# EAGLE board Z80_Sound_2 (EAGLE 5.10)
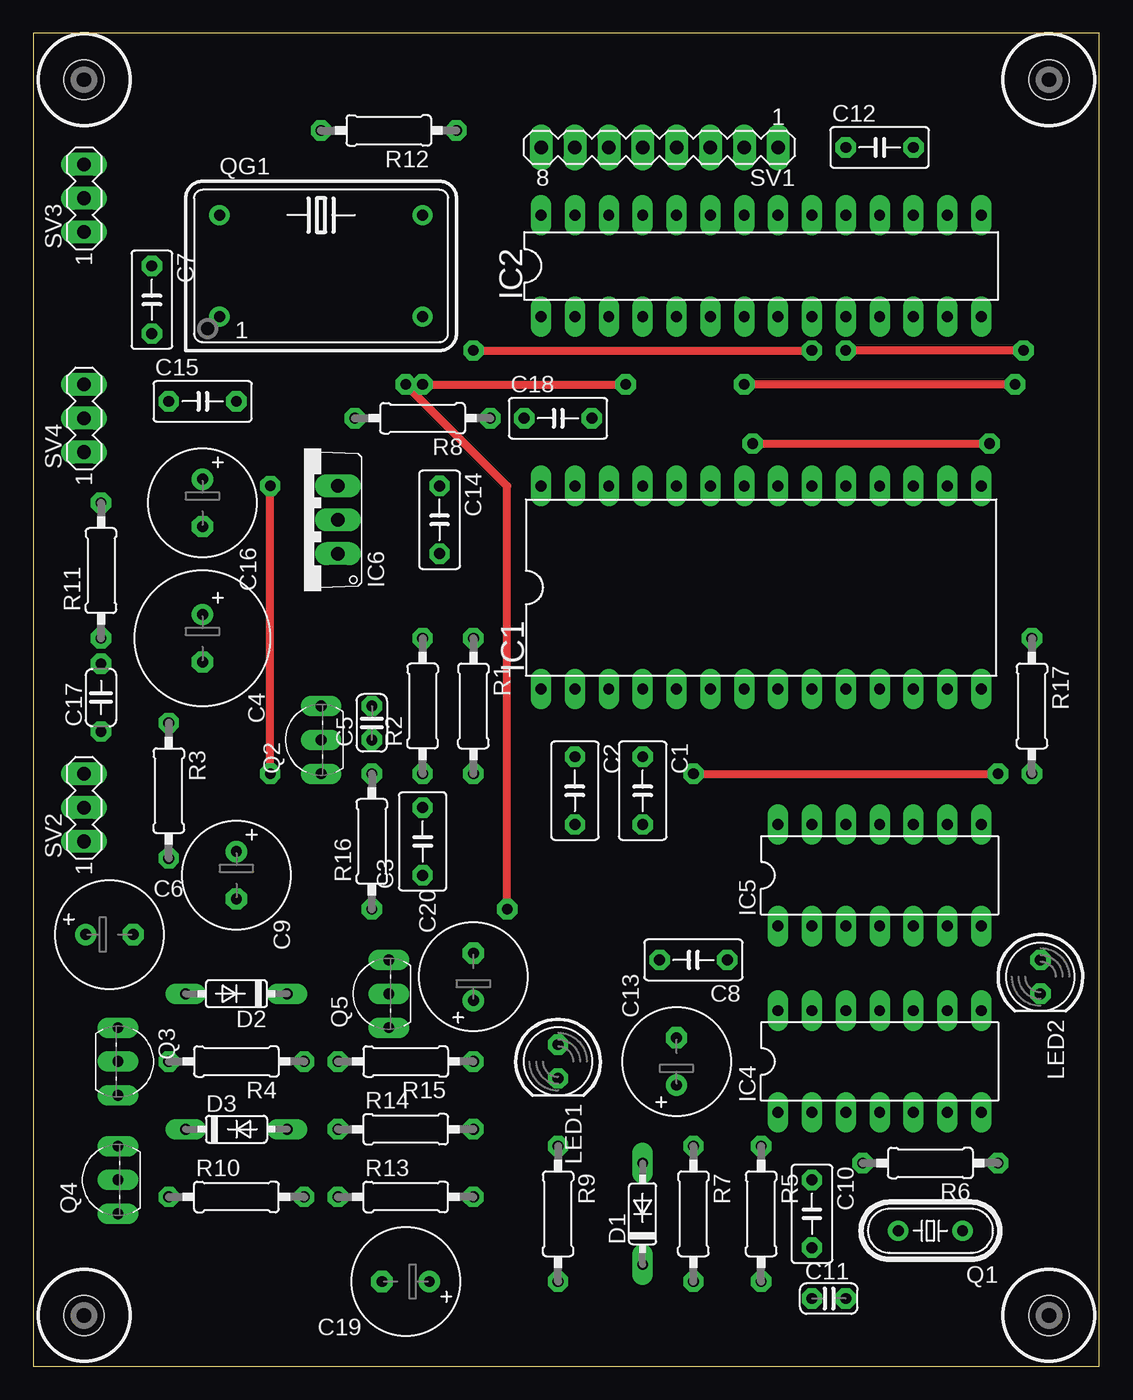
[diagram p0: board, top side]
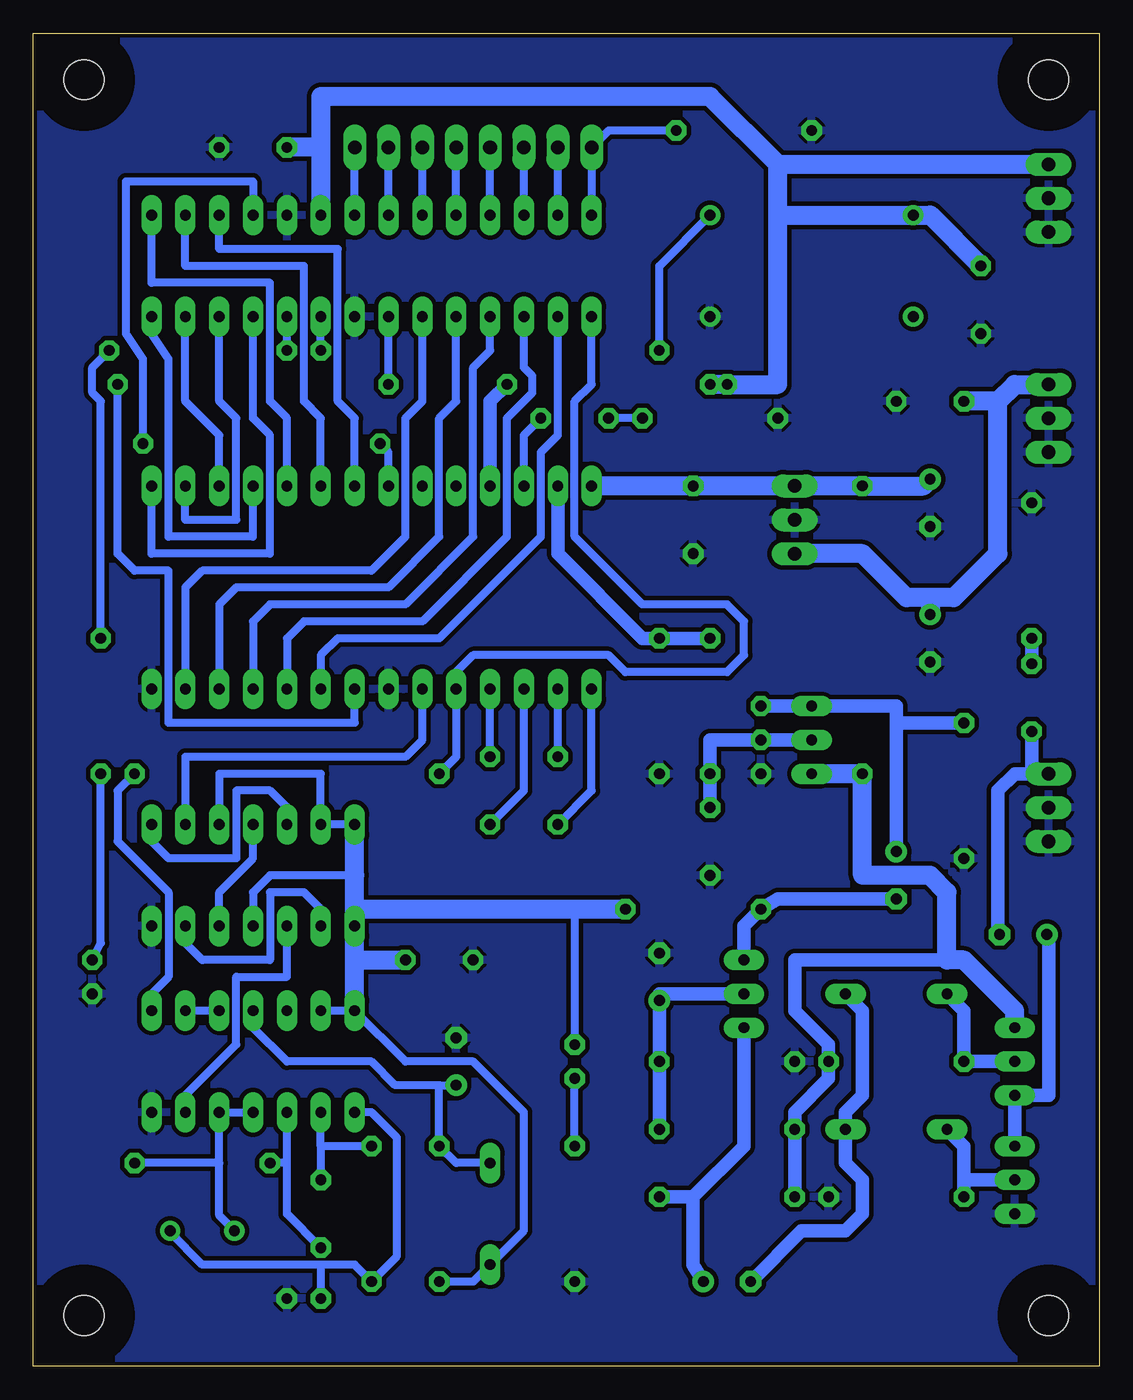
[diagram p1: board, bottom side, seen from below]

Size 79.99 x 100 mm. Coordinates in mm from the lower left corner, seen from the top.
Outline: 0,0 79.99,0 79.99,100 0,100 0,0
Copper layers (1*16): Top 0.035mm / dielectric 1.5mm / Bottom 0.035mm
Design rules "default *": minimum track width 10mil, minimum drill 24mil, track to track 13mil, track to pad 13mil, pad to pad 8mil, via to via 8mil, smd to smd 8mil, copper to edge 12mil, drill to drill 8mil, minimum pad ring 14mil, minimum via ring 14mil, stop-mask expansion 4mil, vias tented up to drill 0mil, thermal gap 10mil

## Footprints (pad centres in the part's own frame; a part is rotated, then mirrored left to right if it is on the bottom)
C050-035X075 = drill 0.813 octagon: 1 -2.54,0; 2 2.54,0
E3,5-10 = drill 0.813 pad 1.6 round: + -1.778,0 | drill 0.813 pad 1.6 octagon: - 1.778,0
C025-024X044 = drill 0.813 octagon: 1 -1.27,0; 2 1.27,0
E3,5-8 = drill 0.813 pad 1.6 round: + -1.778,0 | drill 0.813 pad 1.6 octagon: - 1.778,0
C050-030X075 = drill 0.813 octagon: 1 -2.54,0; 2 2.54,0
C050-024X044 = drill 0.813 octagon: 1 -2.54,0; 2 2.54,0
DO35-7 = drill 0.813 long: A 3.81,0; C -3.81,0
DIL28-6 = drill 0.813 long: 1 -16.51,-7.62; 2 -13.97,-7.62; 3 -11.43,-7.62; 4 -8.89,-7.62; 5 -6.35,-7.62; 6 -3.81,-7.62; 7 -1.27,-7.62; 8 1.27,-7.62; 9 3.81,-7.62; 10 6.35,-7.62; 11 8.89,-7.62; 12 11.43,-7.62; 13 13.97,-7.62; 14 16.51,-7.62; 15 16.51,7.62; 16 13.97,7.62; 17 11.43,7.62; 18 8.89,7.62; 19 6.35,7.62; 20 3.81,7.62; 21 1.27,7.62; 22 -1.27,7.62; 23 -3.81,7.62; 24 -6.35,7.62; 25 -8.89,7.62; 26 -11.43,7.62; 27 -13.97,7.62; 28 -16.51,7.62
DIL28-3 = drill 0.813 long: 1 -16.51,-3.81; 2 -13.97,-3.81; 3 -11.43,-3.81; 4 -8.89,-3.81; 5 -6.35,-3.81; 6 -3.81,-3.81; 7 -1.27,-3.81; 8 1.27,-3.81; 9 3.81,-3.81; 10 6.35,-3.81; 11 8.89,-3.81; 12 11.43,-3.81; 13 13.97,-3.81; 14 16.51,-3.81; 15 16.51,3.81; 16 13.97,3.81; 17 11.43,3.81; 18 8.89,3.81; 19 6.35,3.81; 20 3.81,3.81; 21 1.27,3.81; 22 -1.27,3.81; 23 -3.81,3.81; 24 -6.35,3.81; 25 -8.89,3.81; 26 -11.43,3.81; 27 -13.97,3.81; 28 -16.51,3.81
DIL14 = drill 0.813 long: 1 -7.62,-3.81; 2 -5.08,-3.81; 3 -2.54,-3.81; 4 0,-3.81; 5 2.54,-3.81; 6 5.08,-3.81; 7 7.62,-3.81; 8 7.62,3.81; 9 5.08,3.81; 10 2.54,3.81; 11 0,3.81; 12 -2.54,3.81; 13 -5.08,3.81; 14 -7.62,3.81
TO220V = drill 1.016 long: 1 -2.54,-2.54; 2 0,-2.54; 3 2.54,-2.54
LED5MM = drill 0.813 octagon: A -1.27,0; K 1.27,0
HC49/S = drill 0.813 round: 1 -2.413,0; 2 2.413,0
TO92-EBC = drill 0.813 long: B 0,-1.27; C -2.54,-1.27; E 2.54,-1.27
DIL14S = drill 0.813 round: 1 -7.62,-3.81; 7 7.62,-3.81; 8 7.62,3.81; 14 -7.62,3.81
0207/10 = drill 0.813 octagon: 1 -5.08,0; 2 5.08,0
MA08-1 = drill 1.016 long: 1 -8.89,0; 2 -6.35,0; 3 -3.81,0; 4 -1.27,0; 5 1.27,0; 6 3.81,0; 7 6.35,0; 8 8.89,0
MA03-1 = drill 1.016 long: 1 -2.54,0; 2 0,0; 3 2.54,0
DRIL-3 = hole 3: 0,0

## Placement (x,y rotation side)
C1  22n  [C050-035X075]  45.72,43.18 270 top
C2  22n  [C050-035X075]  40.64,43.18 270 top
C3  1n  [C050-035X075]  29.21,39.37 90 top
C4  470µ  [E3,5-10]  12.7,54.61 270 top
C5  470p  [C025-024X044]  25.4,48.26 90 top
C6  220µ  [E3,5-8]  5.71,32.38 0 top
C7  100n  [C050-030X075]  8.89,80.01 270 top
C8  100n  [C050-030X075]  49.53,30.48 180 top
C9  10µ  [E3,5-8]  15.24,36.83 270 top
C10  100n  [C050-030X075]  58.42,11.43 270 top
C11  27p  [C025-024X044]  59.69,5.08 0 top
C12  100n  [C050-030X075]  63.5,91.44 0 top
C13  4µ7  [E3,5-8]  48.26,22.86 90 top
C14  100n  [C050-030X075]  30.48,63.5 270 top
C15  100n  [C050-030X075]  12.7,72.39 0 top
C16  220µ  [E3,5-8]  12.7,64.77 270 top
C17  47n  [C050-024X044]  5.08,50.16 90 top
C18  100n  [C050-030X075]  39.37,71.12 0 top
C19  22µ  [E3,5-8]  27.94,6.35 180 top
C20  47µ  [E3,5-8]  33.02,29.21 90 top
D1  1N4148  [DO35-7]  45.72,11.43 90 top
D2  1N4148  [DO35-7]  15.24,27.94 180 top
D3  1N4148  [DO35-7]  15.24,17.78 0 top
IC1  8580 SID  [DIL28-6]  54.61,58.42 0 top
IC2  PIC18F2525  [DIL28-3]  54.61,82.55 0 top
IC4  74LS04  [DIL14]  63.5,22.86 0 top
IC5  74LS74N  [DIL14]  63.5,36.83 0 top
IC6  7809  [TO220V]  20.32,63.5 90 top
LED1  [LED5MM]  39.37,22.86 270 top
LED2  [LED5MM]  75.56,29.21 270 top
Q1  4 MHz  [HC49/S]  67.31,10.16 180 top
Q2  BC548  [TO92-EBC]  20.32,46.99 90 top
Q3  BC548  [TO92-EBC]  7.62,22.86 270 top
Q4  BC558C  [TO92-EBC]  5.08,13.97 90 top
Q5  BC548  [TO92-EBC]  25.4,27.94 90 top
QG1  40 MHz  [DIL14S]  21.59,82.55 0 top
R1  1K  [0207/10]  33.02,49.53 270 top
R2  10K  [0207/10]  29.21,49.53 90 top
R3  1K  [0207/10]  10.16,43.18 270 top
R4  4K7  [0207/10]  15.24,22.86 180 top
R5  680R  [0207/10]  54.61,11.43 270 top
R6  680R  [0207/10]  67.31,15.24 180 top
R7  10K  [0207/10]  49.53,11.43 270 top
R8  47K  [0207/10]  29.21,71.12 180 top
R9  470R  [0207/10]  39.37,11.43 270 top
R10  4K7  [0207/10]  15.24,12.7 0 top
R11  10R  [0207/10]  5.08,59.69 90 top
R12  4K7  [0207/10]  26.67,92.71 180 top
R13  4K7  [0207/10]  27.94,12.7 0 top
R14  120K  [0207/10]  27.94,17.78 0 top
R15  22K  [0207/10]  27.94,22.86 180 top
R16  22K  [0207/10]  25.4,39.37 90 top
R17  470R  [0207/10]  74.93,49.53 270 top
SV1  comm  [MA08-1]  46.99,91.44 180 top
SV2  audio out  [MA03-1]  3.81,41.91 90 top
SV3  5V  [MA03-1]  3.81,87.63 90 top
SV4  12V  [MA03-1]  3.81,71.12 90 top
U$1  [DRIL-3]  76.2,96.52 0 top
U$2  [DRIL-3]  76.2,3.81 0 top
U$3  [DRIL-3]  3.81,3.81 0 top
U$4  [DRIL-3]  3.81,96.52 0 top

## Library data of the parts
C1-C20 R1-R17 = rcl
D1-D3 = diode
IC1 = ic-package
IC2 = microchip
IC4 IC5 = 74xx-us
IC6 = linear
LED1 LED2 = led
Q1 QG1 = crystal
Q2 Q3 Q5 = transistor-npn
Q4 = transistor-pnp
SV1-SV4 = con-lstb
U$1-U$4 = special

## Nets
+12V: C4.+ C15.1 IC6.1 SV4.3
/CS: IC1.8 IC2.7
/RES: IC1.5 IC2.1 IC4.8
A0: IC1.9 IC2.2
A1: IC1.10 IC2.3
A2: IC1.11 IC2.4
A3: IC1.12 IC2.5
A4: IC1.13 IC2.6
AUDIO_OUT: IC1.27 R1.1 R2.2
CAP1A: C2.2 IC1.1
CAP1B: C2.1 IC1.2
CAP2A: C1.2 IC1.3
CAP2B: C1.1 IC1.4
CLK_1MHZ: IC1.6 IC5.9
D0: IC1.15 IC2.11
D1: IC1.16 IC2.12
D2: IC1.17 IC2.13
D3: IC1.18 IC2.14
D4: IC1.19 IC2.15
D5: IC1.20 IC2.16
D6: IC1.21 IC2.17
D7: IC1.22 IC2.18
GND: C3.1 C4.- C7.2 C8.2 C11.2 C12.2 C13.- C14.2 C15.2 C16.- C20.- IC1.7 IC1.14 IC2.8 IC2.19 IC4.7 IC5.7 IC6.2 LED2.K Q4.C QG1.7 R1.2 R3.2 R8.2 R9.2 R10.2 R11.2 R12.2 R15.2 R16.2 SV2.1 SV2.2 SV3.1 SV3.2 SV4.1 SV4.2
N$1: IC2.9 QG1.8
N$2: IC4.4 IC4.5 Q1.2 R6.1
N$3: C5.2 C9.+ Q2.E R3.1
N$4: LED1.K R9.1
N$5: C6.- C17.1 SV2.3
N$6: C3.2 C5.1 Q2.B R2.1
N$7: LED2.A R17.2
N$8: C17.2 R11.1
N$9: D3.C Q4.B R10.1
N$10: D2.A Q3.B R4.2
N$11: C11.1 IC4.1 Q1.1 R5.2
N$12: IC5.2 IC5.6
N$13: IC5.8 IC5.12
N$14: IC4.6 IC5.3
N$15: IC5.5 IC5.11
N$16: IC4.9 IC4.10
N$17: C13.+ D1.A IC4.11 R7.1
N$18: C10.1 IC4.2 R5.1
N$19: C10.2 IC4.3 R6.2
N$20: C18.2 IC1.26
N$21: C6.+ Q3.E Q4.E
N$22: C19.- D2.C D3.A
N$23: C18.1 R8.1
N$24: IC2.10 R17.1
N$25: C19.+ Q5.C R13.2
N$26: C9.- Q5.E R16.1
N$27: C20.+ Q5.B R14.2 R15.1
POTX: IC1.24
POTY: IC1.23
RB0: IC2.21 SV1.1
RB1: IC2.22 SV1.2
RB2: IC2.23 SV1.3
RB3: IC2.24 SV1.4
RB4: IC2.25 SV1.5
RB5: IC2.26 SV1.6
RB6: IC2.27 SV1.7
RB7: IC2.28 R12.1 SV1.8
VCC: C7.1 C8.1 C12.1 D1.C IC1.25 IC2.20 IC4.13 IC4.14 IC5.1 IC5.4 IC5.10 IC5.13 IC5.14 LED1.A QG1.14 R7.2 SV3.3
VDD: C14.1 C16.+ IC1.28 IC6.3 Q2.C Q3.C R4.1 R13.1 R14.1

## Tracks (layer width: path | path; a pad name or v marks a point on that pad's centre or on a via)
+12V
  Bottom 1.422: 7.62,72.39 7.62,60.96 10.92,57.66 12.7,57.66 | 7.62,72.39 6.35,73.66 SV4.3 | IC6.1 17.78,60.96 14.48,57.66 12.7,57.66 | 7.62,72.39 C15.1 | 12.7,57.66 C4.+
/CS  (via drill 0.8)
  Top 0.61: v73.66,73.66 v53.34,73.66
  Bottom 0.61: v53.34,73.66 IC2.7 | IC1.8 55.88,48.26 69.85,48.26 69.85,59.69 72.39,59.69 73.66,60.96 v73.66,73.66
/RES  (via drill 0.8)
  Top 0.61: v49.53,44.45 v72.39,44.45
  Bottom 0.61: IC2.1 38.1,73.66 39.37,72.39 39.37,62.23 34.29,57.15 27.94,57.15 26.67,55.88 26.67,53.34 27.94,52.07 35.56,52.07 36.83,53.34 46.99,53.34 48.26,52.07 IC1.5 48.26,45.72 v49.53,44.45 | IC4.8 71.12,27.94 69.85,29.21 69.85,35.56 73.66,39.37 73.66,43.18 v72.39,44.45
A0
  Bottom 0.61: IC1.9 58.42,53.34 57.15,54.61 49.53,54.61 41.91,62.23 41.91,68.58 40.64,69.85 IC2.2
A1
  Bottom 0.61: IC1.10 60.96,54.61 59.69,55.88 50.8,55.88 44.45,62.23 44.45,71.12 42.55,73.03 42.55,74.3 43.18,74.93 IC2.3
A2
  Bottom 0.61: IC1.11 63.5,55.88 62.23,57.15 52.07,57.15 46.99,62.23 46.99,74.93 45.72,76.2 IC2.4
A3
  Bottom 0.61: IC1.12 66.04,57.15 64.77,58.42 53.34,58.42 49.53,62.23 49.53,71.12 48.26,72.39 IC2.5
A4
  Bottom 0.61: IC2.6 50.8,72.39 52.07,71.12 52.07,62.23 54.61,59.69 67.31,59.69 68.58,58.42 IC1.13
AUDIO_OUT
  Bottom 1.016: R2.2 R1.1 34.29,54.61 40.64,60.96 IC1.27
CAP1A
  Bottom 0.61: IC1.1 38.1,43.18 C2.2
CAP1B
  Bottom 0.61: C2.1 IC1.2
CAP2A
  Bottom 0.61: IC1.3 43.18,43.18 C1.2
CAP2B
  Bottom 0.61: C1.1 IC1.4
CLK_1MHZ
  Bottom 0.61: IC5.9 68.58,45.72 52.07,45.72 50.8,46.99 IC1.6
D0
  Bottom 0.61: IC2.11 63.5,71.12 62.23,69.85 62.23,60.96 71.12,60.96 IC1.15
D1
  Bottom 0.61: IC1.16 68.58,63.5 64.77,63.5 64.77,71.12 66.04,72.39 IC2.12
D2
  Bottom 0.61: IC2.13 68.58,72.39 66.04,69.85 IC1.17
D3
  Bottom 0.61: IC1.18 63.5,62.23 69.85,62.23 69.85,75.56 71.12,77.47 IC2.14
D4
  Bottom 0.61: IC1.19 60.96,71.12 62.23,72.39 62.23,81.28 71.12,81.28 IC2.15
D5
  Bottom 0.61: IC2.16 68.58,82.55 59.69,82.55 59.69,72.39 58.42,71.12 IC1.20
D6
  Bottom 0.61: IC2.17 66.04,83.82 57.15,83.82 57.15,72.39 55.88,71.12 IC1.21
D7  (via drill 0.8)
  Top 0.61: v53.98,69.22 v71.75,69.22
  Bottom 0.61: IC2.18 63.5,88.9 73.03,88.9 73.03,77.47 71.75,75.56 v71.75,69.22 | IC1.22 53.34,68.58 v53.98,69.22
GND
  pour Bottom: 0,100.33 0,0 80.01,0 80.01,100.33
N$1  (via drill 0.8)
  Top 0.61: v33.02,76.2 v58.42,76.2
  Bottom 0.61: v58.42,76.2 IC2.9 | v33.02,76.2 33.02,82.55 QG1.8
N$2
  Bottom 0.61: IC4.4 IC4.5 66.04,15.24 | Q1.2 66.04,11.3 66.04,15.24 | 66.04,15.24 R6.1
N$3
  Bottom 1.016: C5.2 Q2.E 15.24,49.53 15.24,48.26 | C9.+ 15.24,48.26 | 15.24,48.26 R3.1
N$4
  Bottom 0.61: R9.1 LED1.K
N$5
  Bottom 1.016: C6.- 7.49,32.26 7.62,32.38 7.62,43.18 6.35,44.45 5.08,44.45 | 5.08,44.45 SV2.3 | 5.08,44.45 C17.1
N$6
  Bottom 1.016: Q2.B C5.1 29.21,46.99 R2.1 C3.2
N$7
  Bottom 0.61: R17.2 74.93,31.75 LED2.A
N$8
  Bottom 1.016: C17.2 R11.1
N$9
  Bottom 1.016: Q4.B 10.16,13.97 | 10.16,13.97 R10.1 | 10.16,13.97 10.16,16.51 D3.C
N$10
  Bottom 1.016: D2.A 10.16,26.67 R4.2 Q3.B
N$11
  Bottom 0.61: Q1.1 69.72,10.03 67.31,7.62 58.42,7.62 | 58.42,7.62 55.88,7.62 R5.2 52.7,8.26 52.7,17.14 54.61,19.05 IC4.1 | 58.42,7.62 C11.1
N$12
  Bottom 0.61: IC5.2 58.42,34.29 59.69,35.56 62.23,35.56 62.23,30.48 67.31,30.48 68.58,31.75 IC5.6
N$13
  Bottom 0.61: IC5.8 71.12,39.37 69.85,38.1 64.77,38.1 64.77,43.18 62.23,43.18 60.96,41.91 IC5.12
N$14
  Bottom 0.61: IC4.6 68.58,20.32 64.77,24.13 64.77,29.21 60.96,29.21 IC5.3
N$15
  Bottom 0.61: IC5.5 66.04,35.56 63.5,38.1 IC5.11
N$16
  Bottom 0.61: IC4.10 IC4.9
N$17
  Bottom 0.61: 49.53,21.08 C13.+ | 49.53,21.08 52.83,21.08 54.61,22.86 60.96,22.86 63.5,25.4 IC4.11 | D1.A 48.26,15.24 R7.1 49.53,21.08
N$18
  Bottom 0.61: 58.42,16.51 IC4.2 | R5.1 58.42,16.51 | 58.42,16.51 C10.1
N$19
  Bottom 0.61: C10.2 60.96,11.43 60.96,15.24 | 60.96,15.24 IC4.3 | 60.96,15.24 R6.2
N$20
  Bottom 0.61: IC1.26 43.18,69.85 C18.2
N$21
  Bottom 1.016: Q4.E Q3.E 3.81,20.32 3.81,32.38 C6.+
N$22
  Bottom 1.016: D2.C 17.78,26.67 17.78,20.32 19.05,19.05 D3.A 19.05,15.24 17.78,13.97 17.78,11.43 19.05,10.16 22.35,10.16 C19.-
N$23
  Bottom 0.61: R8.1 C18.1
N$24  (via drill 0.8)
  Top 0.61: v74.3,76.2 v60.96,76.2
  Bottom 0.61: v60.96,76.2 IC2.10 | v74.3,76.2 75.56,74.93 75.56,73.03 74.93,72.39 R17.1
N$25
  Bottom 1.016: 30.48,12.7 26.67,16.51 Q5.C | 30.48,12.7 R13.2 | C19.+ 30.48,7.62 30.48,12.7
N$26
  Bottom 1.016: C9.- 24.13,35.05 R16.1 26.67,33.02 Q5.E
N$27
  Bottom 1.016: Q5.B 33.02,27.94 C20.+ R15.1 R14.2
RB0
  Bottom 0.61: IC2.21 SV1.1
RB1
  Bottom 0.61: IC2.22 SV1.2
RB2
  Bottom 0.61: IC2.23 SV1.3
RB3
  Bottom 0.61: IC2.24 SV1.4
RB4
  Bottom 0.61: IC2.25 SV1.5
RB5
  Bottom 0.61: IC2.26 SV1.6
RB6
  Bottom 0.61: IC2.27 SV1.7
RB7
  Bottom 0.61: IC2.28 SV1.8 36.83,92.71 R12.1
VCC  (via drill 0.8)
  Top 0.61: v35.56,34.29 35.56,66.04 v27.94,73.66 | v29.21,73.66 v44.45,73.66
  Bottom 0.61: IC5.10 66.04,44.45 58.42,44.45 IC5.13 IC5.14 | 55.88,36.83 62.23,36.83 63.5,35.56 IC5.4 | R7.2 46.99,6.35 D1.C 43.18,10.16 43.18,19.05 46.99,22.86 52.07,22.86 IC4.14 IC4.13 | 39.37,34.29 LED1.A
  Bottom 1.016: IC1.25 45.72,72.39 v44.45,73.66
  Bottom 1.422: IC4.14 55.88,30.48 | 55.88,30.48 IC5.1 55.88,34.29 | 55.88,34.29 55.88,36.83 IC5.14 | C7.1 12.7,86.36 QG1.14 24.13,86.36 | 58.42,91.44 58.42,95.25 29.21,95.25 24.13,90.17 | 58.42,91.44 IC2.20 | 24.13,86.36 24.13,90.17 | 58.42,91.44 C12.1 | 55.88,30.48 C8.1 | 24.13,86.36 24.13,73.66 v27.94,73.66 v29.21,73.66 | 55.88,34.29 39.37,34.29 v35.56,34.29 | 24.13,90.17 SV3.3
VDD  (via drill 0.8)
  Top 0.61: v17.78,44.45 v17.78,66.04
  Bottom 1.016: R13.1 R14.1 22.86,19.05 20.32,21.59 R4.1 20.32,24.13 22.86,26.67 22.86,30.48 11.43,30.48
  Bottom 1.422: IC1.28 C14.1 IC6.3 v17.78,66.04 13.21,66.04 C16.+ | Q3.C 6.35,26.67 10.16,30.48 11.43,30.48 11.43,35.56 12.7,36.83 17.78,36.83 v17.78,44.45 Q2.C